# Altium PCB MainboardPCB.PcbDoc (part 1 of 2)
Units mm, origin at the board's own origin, x right, y up, seen from the top; angles counter-clockwise.
Board outline 134.24 x 134.24 mm, 2 copper layers (Top Layer, Bottom Layer); 101 components, 150 nets, 492 pads, 247 vias.
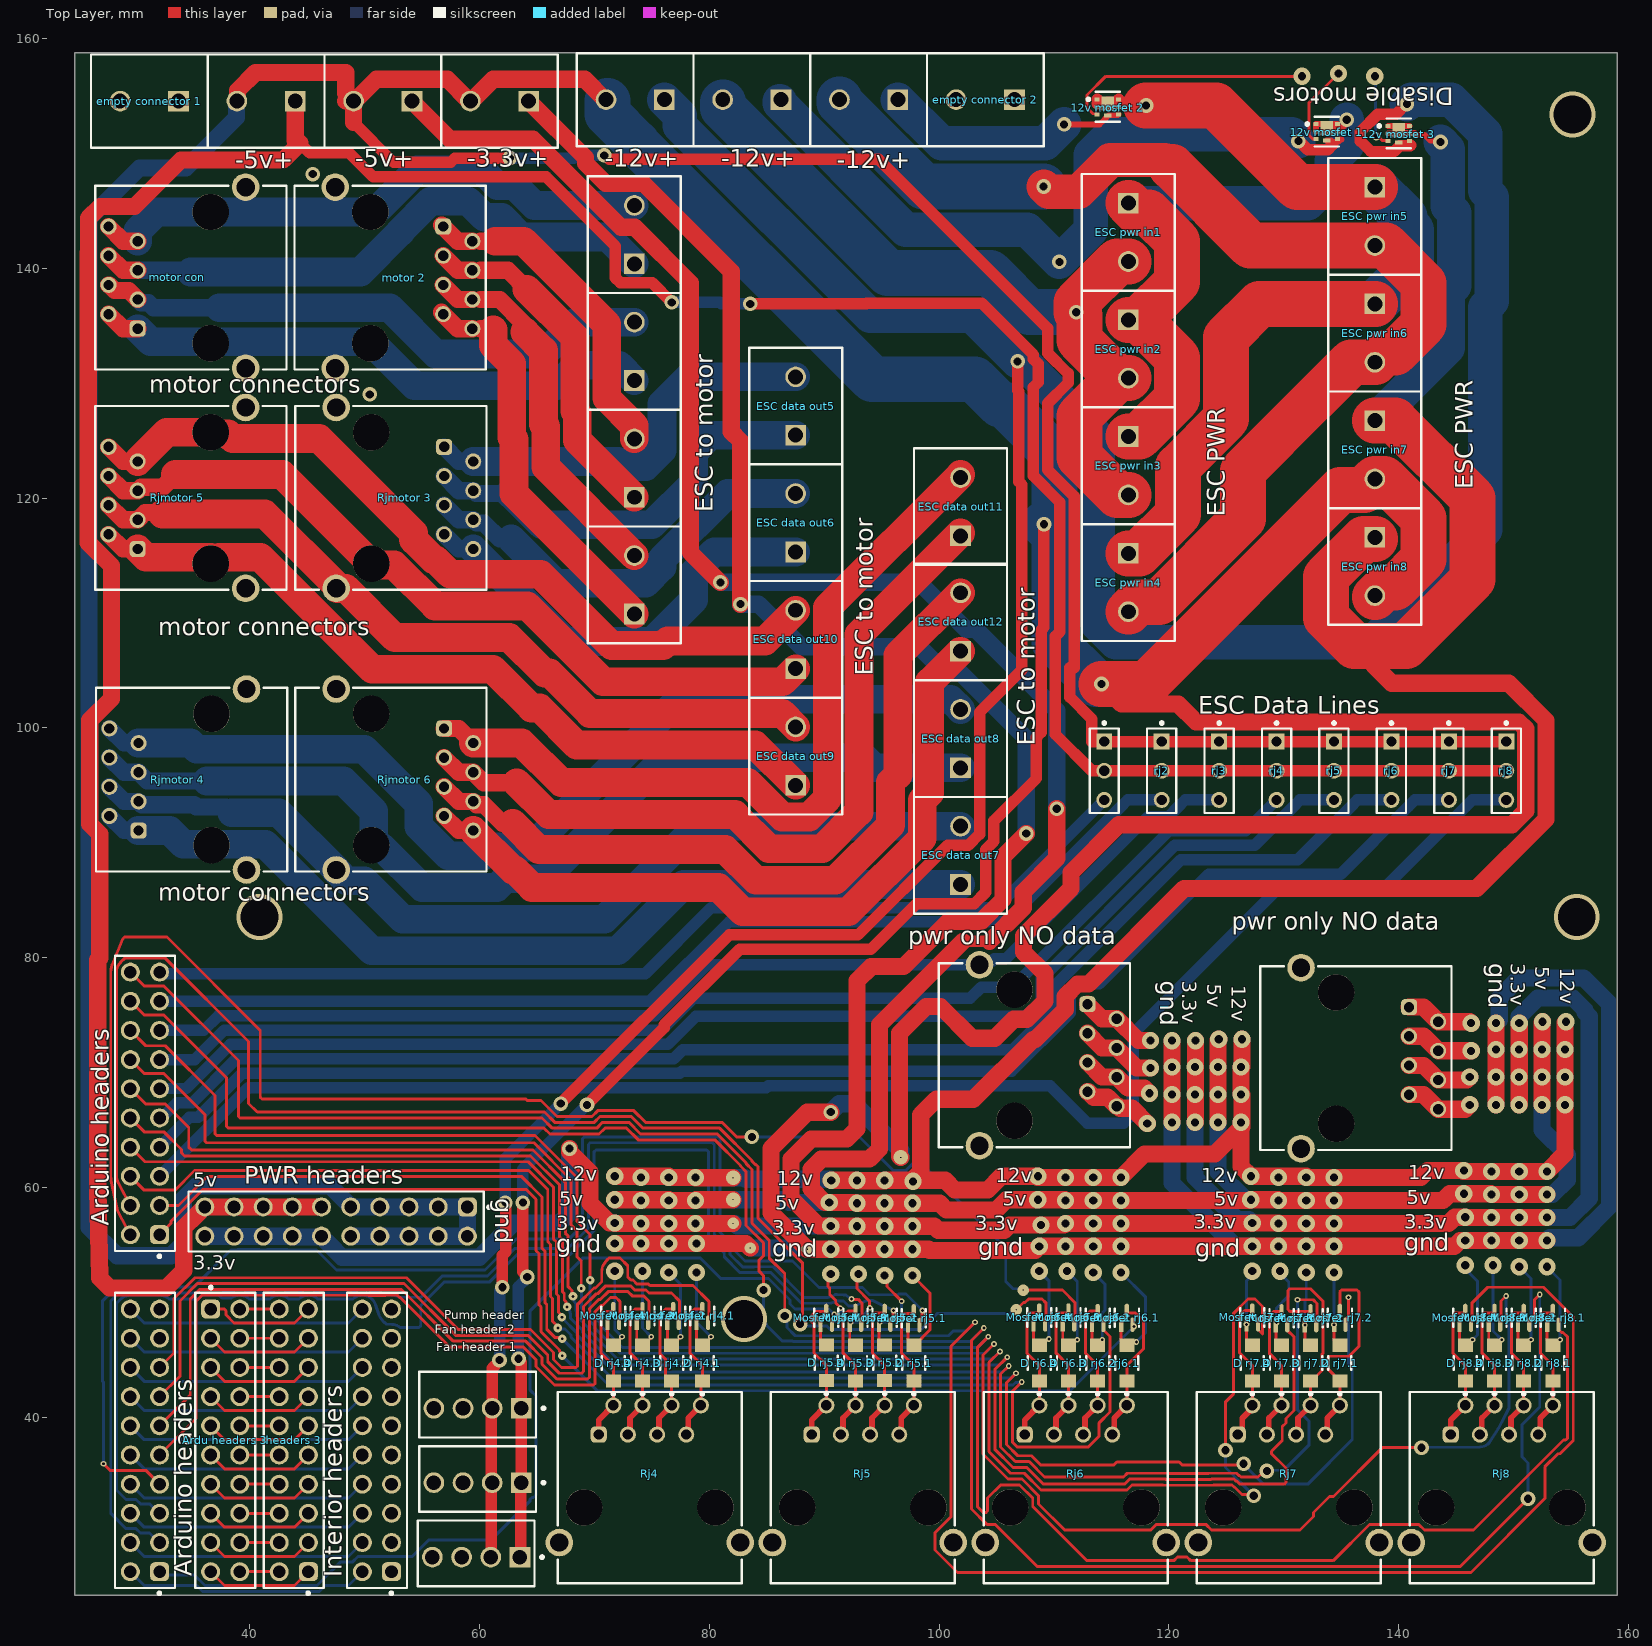
[diagram p0: Top Layer view]
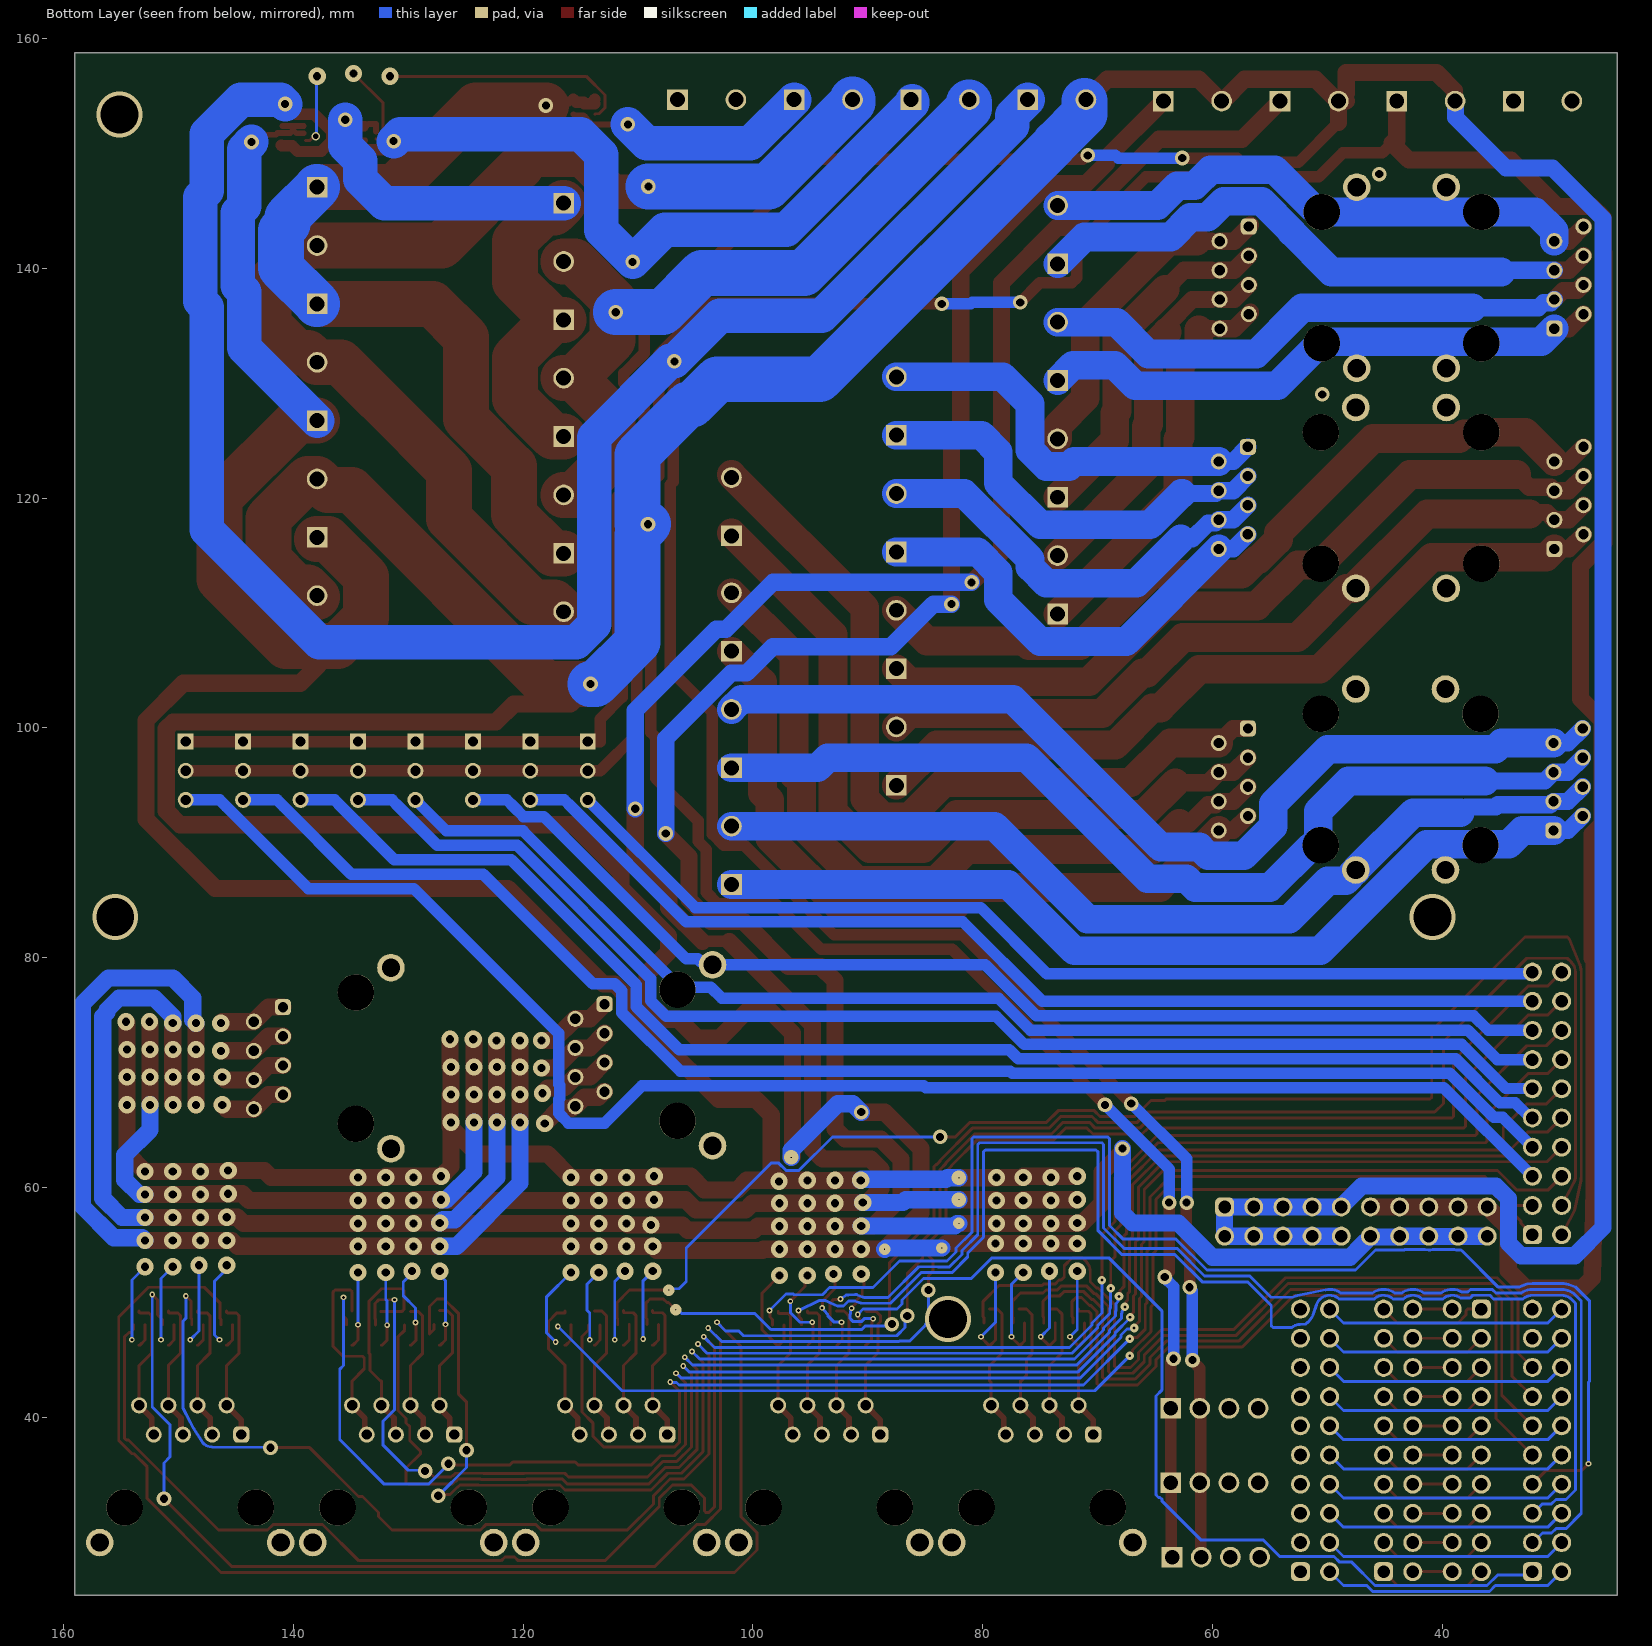
[diagram p1: Bottom Layer view, seen from below]
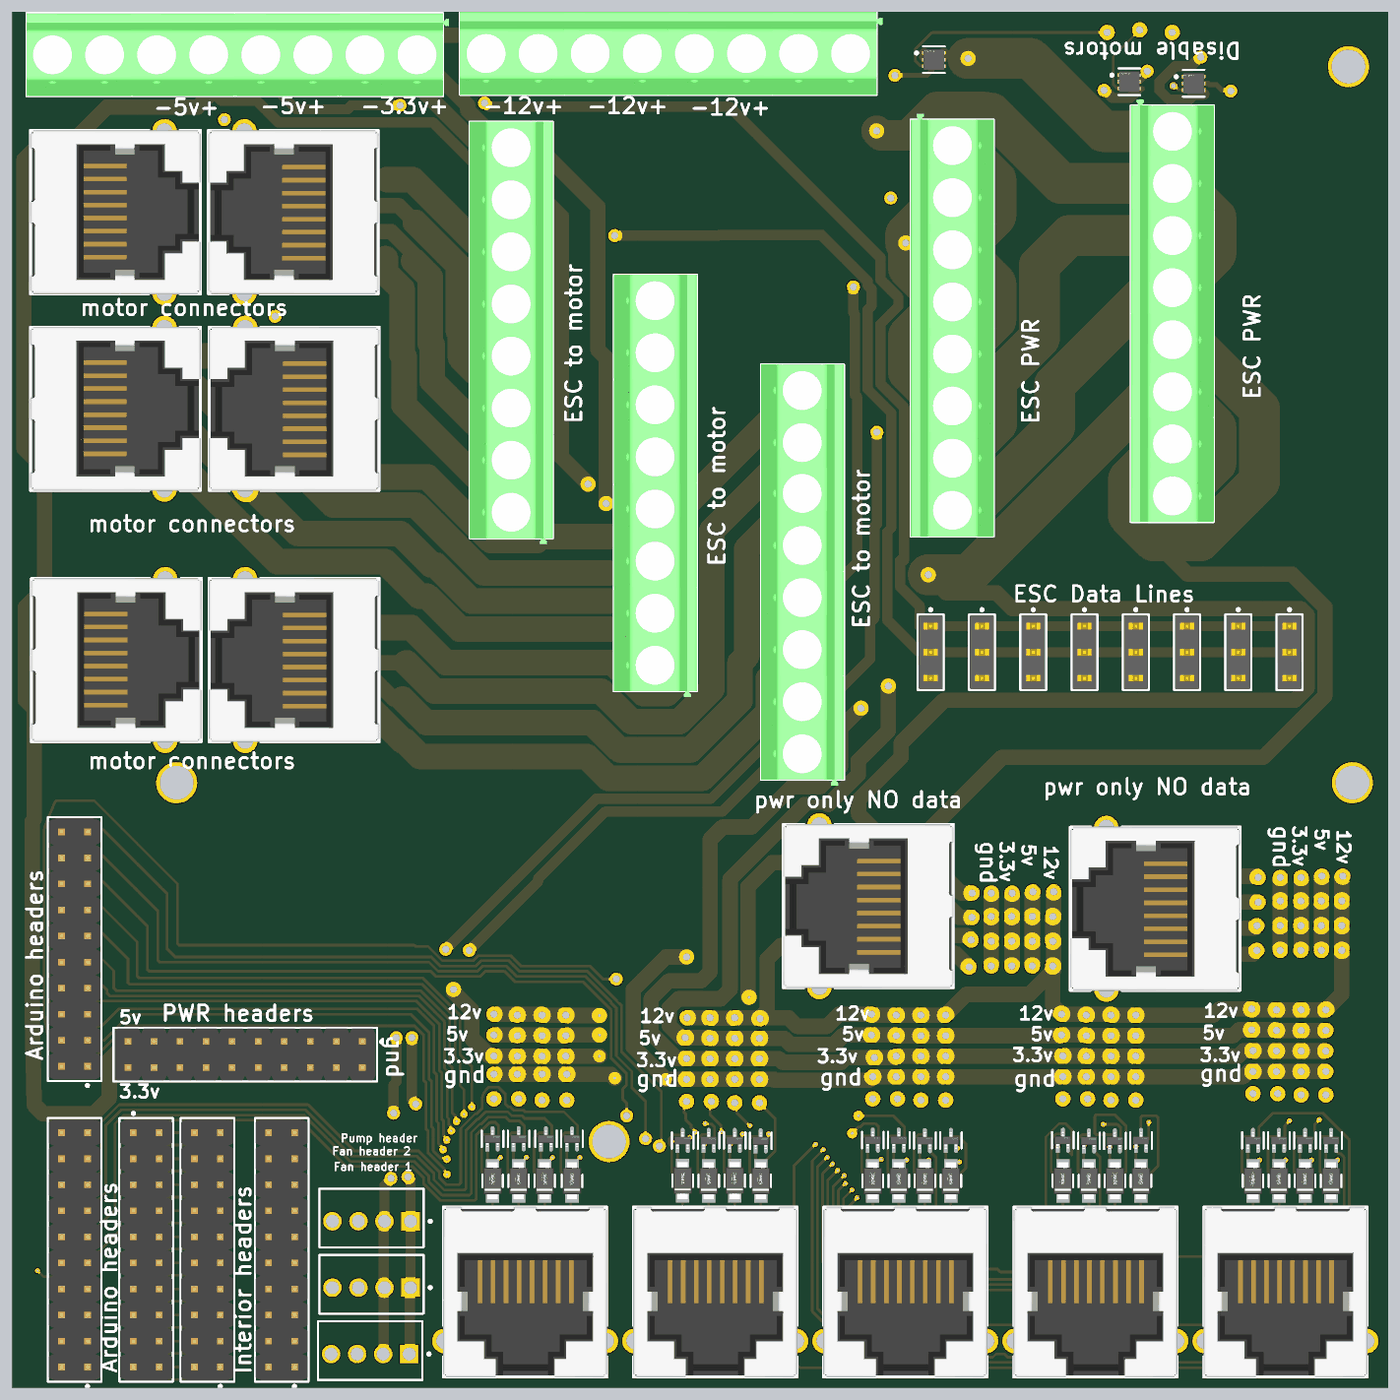
[diagram p3: 3D render of the assembled board from above, using the file's embedded part models]

## Layer stack, top to bottom
Top Solder: solder mask 0.0102, Solder Resist, Dk 3.5
Top Layer: signal copper 0.0356
Dielectric 1: dielectric 0.32, FR-4, Dk 4.8
Bottom Layer: signal copper 0.0356
Bottom Solder: solder mask 0.0102, Solder Resist, Dk 3.5

## Board outline
24.765,24.511 159.004,24.511 159.004,158.75 24.765,158.75

## Design rules (kind name [scope] priority, off if disabled: settings)
Clearance [All] p1: gap=0.254 ignorepadtopadclearanceinfootprint=FALSE
PolygonConnect [All] p1: connectstyle=Relief reliefconductorwidth=0.254 reliefentries=4 polygonreliefangle="90 Angle" airgapwidth=0.254
RoutingVias [All] p1: holewidth=0.711 width=1.27 viastyle="Through Hole" minholewidth=0.711 minwidth=1.27 maxholewidth=0.711 maxwidth=1.27
SolderMaskExpansion [All] p1: expansion=0.102 istentingtop=FALSE
Width [All] p1: maxlimit=5 minlimit=0.254 preferedwidth=0.254 minimp=50.000000 maximp=50.000000 favimp=50.000000
30 further rules are at their usual default settings.

## Classes and differential pairs
component class MainboardPCB: "12v mosfet 1" "12v mosfet 2" "12v mosfet 3" -3.3v+ -5v+ "Ardu headers 3" "D rj4.1" "D rj4.2" "D rj4.3" "D rj4.4" "D rj5.1" "D rj5.2" "D rj5.3" "D rj5.4" "D rj6.2" "D rj6.3" "D rj6.4" "D rj7.1" "D rj7.2" "D rj7.3" "D rj7.4" "D rj8.1" "D rj8.2" "D rj8.3" "D rj8.4" "empty connector 1" "empty connector 2" "ESC data out5" "ESC data out6" "ESC data out7" "ESC data out8" "ESC data out9" "ESC data out10" "ESC data out11" "ESC data out12" "ESC pwr in1" "ESC pwr in2" "ESC pwr in3" "ESC pwr in4" "ESC pwr in5" "ESC pwr in6" "ESC pwr in7" "ESC pwr in8" "Fan header 1" "Fan header 2" "headers 3" "Mosfet rj4.1" "Mosfet rj4.2" "Mosfet rj4.3" "Mosfet rj4.4" "Mosfet rj5.1" "Mosfet rj5.2" "Mosfet rj5.3" "Mosfet rj5.4" "Mosfet rj6.1" "Mosfet rj6.2" "Mosfet rj6.3" "Mosfet rj6.4" "Mosfet rj7.2" "Mosfet rj7.3" "Mosfet rj7.4" "Mosfet rj8.1" "Mosfet rj8.2" "Mosfet rj8.3" "Mosfet rj8.4" "motor 2" "Pump header" rj2 rj3 rj4 Rj4 Rj5 rj5 rj6 Rj6 rj6.1 rj7 Rj7 rj8 Rj8 "Rjmotor 3" "Rjmotor 4" "Rjmotor 5" "Rjmotor 6"

## Components (designator, comment, footprint, x,y, rotation, side; value= is the part's Value field where it differs from the comment)
"12v mosfet 1" "BUK6D43-40PX" FP-SOT1220-MFG 133.739,151.909 r0 top
"12v mosfet 2" "BUK6D43-40PX" FP-SOT1220-MFG 114.681,154.064 r0 top
"12v mosfet 3" "BUK6D43-40PX" FP-SOT1220-MFG 140.012,151.751 r0 top
-3.3v+ "1729128" PHOE-1729128-2_V 61.722,154.559 r180 top (schematic designator 3.3vin)
-5v+ "1729128" PHOE-1729128-2_V 41.402,154.559 r180 top (schematic designator 5vin1)
-5v+ "1729128" PHOE-1729128-2_V 51.562,154.559 r180 top (schematic designator 5vin2)
-12v+ "1729128" PHOE-1729128-2_V 93.853,154.686 r180 top (schematic designator 12vin2)
-12v+ "1729128" PHOE-1729128-2_V 73.533,154.686 r180 top (schematic designator 12vin3)
-12v+ "1729128" PHOE-1729128-2_V 83.693,154.686 r180 top (schematic designator 12vin1)
"Ardu headers 3" "61302021121" 61302021121 37.846,37.973 r270 top
"Arduino headers" "61302021121" 61302021121 30.861,37.973 r90 top (schematic designator "Ardu headers 2")
"Arduino headers" "61302021121" 61302021121 30.861,67.31 r90 top (schematic designator "Ardu headers 1")
"D rj4.1" "1N4007FL" FP-1N4007FL-MFG 79.375,44.704 r90 top
"D rj4.2" "1N4007FL" FP-1N4007FL-MFG 76.708,44.704 r90 top
"D rj4.3" "1N4007FL" FP-1N4007FL-MFG 74.168,44.704 r90 top
"D rj4.4" "1N4007FL" FP-1N4007FL-MFG 71.628,44.704 r90 top
"D rj5.1" "1N4007FL" FP-1N4007FL-MFG 97.79,44.704 r90 top
"D rj5.2" "1N4007FL" FP-1N4007FL-MFG 95.25,44.73 r90 top
"D rj5.3" "1N4007FL" FP-1N4007FL-MFG 92.71,44.704 r90 top
"D rj5.4" "1N4007FL" FP-1N4007FL-MFG 90.17,44.73 r90 top
"D rj6.2" "1N4007FL" FP-1N4007FL-MFG 113.792,44.704 r90 top
"D rj6.3" "1N4007FL" FP-1N4007FL-MFG 111.252,44.704 r90 top
"D rj6.4" "1N4007FL" FP-1N4007FL-MFG 108.712,44.704 r90 top
"D rj7.1" "1N4007FL" FP-1N4007FL-MFG 134.874,44.704 r90 top
"D rj7.2" "1N4007FL" FP-1N4007FL-MFG 132.334,44.704 r90 top
"D rj7.3" "1N4007FL" FP-1N4007FL-MFG 129.794,44.704 r90 top
"D rj7.4" "1N4007FL" FP-1N4007FL-MFG 127.254,44.704 r90 top
"D rj8.1" "1N4007FL" FP-1N4007FL-MFG 153.416,44.704 r90 top
"D rj8.2" "1N4007FL" FP-1N4007FL-MFG 150.876,44.704 r90 top
"D rj8.3" "1N4007FL" FP-1N4007FL-MFG 148.336,44.704 r90 top
"D rj8.4" "1N4007FL" FP-1N4007FL-MFG 145.796,44.704 r90 top
"empty connector 1" "1729128" PHOE-1729128-2_V 31.242,154.559 r180 top
"empty connector 2" "1729128" PHOE-1729128-2_V 104.013,154.686 r180 top
"ESC Data Lines" "87224-3" FP-87224-3-MFG 114.365,96.266 r270 top (schematic designator rj1)
"ESC data out1" "1729128" PHOE-1729128-2_V 73.461,132.777 r90 top
"ESC data out2" "1729128" PHOE-1729128-2_V 73.461,142.937 r90 top
"ESC data out4" "1729128" PHOE-1729128-2_V 73.461,112.457 r90 top
"ESC data out5" "1729128" PHOE-1729128-2_V 87.503,128.016 r90 top
"ESC data out6" "1729128" PHOE-1729128-2_V 87.503,117.856 r90 top
"ESC data out7" "1729128" PHOE-1729128-2_V 101.854,88.9 r90 top
"ESC data out8" "1729128" PHOE-1729128-2_V 101.854,99.06 r90 top
"ESC data out9" "1729128" PHOE-1729128-2_V 87.503,97.536 r90 top
"ESC data out10" "1729128" PHOE-1729128-2_V 87.503,107.696 r90 top
"ESC data out11" "1729128" PHOE-1729128-2_V 101.854,119.253 r90 top
"ESC data out12" "1729128" PHOE-1729128-2_V 101.854,109.22 r90 top
"ESC pwr in1" "1729128" PHOE-1729128-2_V 116.459,143.137 r270 top
"ESC pwr in2" "1729128" PHOE-1729128-2_V 116.459,132.977 r270 top
"ESC pwr in3" "1729128" PHOE-1729128-2_V 116.459,122.817 r270 top
"ESC pwr in4" "1729128" PHOE-1729128-2_V 116.459,112.649 r270 top
"ESC pwr in5" "1729128" PHOE-1729128-2_V 137.922,144.526 r270 top
"ESC pwr in6" "1729128" PHOE-1729128-2_V 137.922,134.366 r270 top
"ESC pwr in7" "1729128" PHOE-1729128-2_V 137.922,124.206 r270 top
"ESC pwr in8" "1729128" PHOE-1729128-2_V 137.922,114.046 r270 top
"ESC to motor" "1729128" PHOE-1729128-2_V 73.461,122.617 r90 top (schematic designator "ESC data out3")
"Fan header 1" "640456-4" TECO-640456-4 59.69,27.813 r0 top
"Fan header 2" "640456-4" TECO-640456-4 59.817,34.29 r0 top
"headers 3" "61302021121" 61302021121 43.815,37.973 r90 top
"Interior headers" "61302021121" 61302021121 51.054,37.973 r90 top (schematic designator "headers 2")
"Mosfet rj4.1" "DMG1013T-7" FP-SOT523-IPC_B 79.375,48.802 r90 top
"Mosfet rj4.2" "DMG1013T-7" FP-SOT523-IPC_B 76.835,48.802 r90 top
"Mosfet rj4.3" "DMG1013T-7" FP-SOT523-IPC_B 74.168,48.802 r90 top
"Mosfet rj4.4" "DMG1013T-7" FP-SOT523-IPC_B 71.628,48.802 r90 top
"Mosfet rj5.1" "DMG1013T-7" FP-SOT523-IPC_B 97.782,48.607 r90 top
"Mosfet rj5.2" "DMG1013T-7" FP-SOT523-IPC_B 95.25,48.641 r90 top
"Mosfet rj5.3" "DMG1013T-7" FP-SOT523-IPC_B 92.71,48.641 r90 top
"Mosfet rj5.4" "DMG1013T-7" FP-SOT523-IPC_B 90.17,48.641 r90 top
"Mosfet rj6.1" "DMG1013T-7" FP-SOT523-IPC_B 116.332,48.641 r90 top
"Mosfet rj6.2" "DMG1013T-7" FP-SOT523-IPC_B 113.793,48.628 r90 top
"Mosfet rj6.3" "DMG1013T-7" FP-SOT523-IPC_B 111.252,48.675 r90 top
"Mosfet rj6.4" "DMG1013T-7" FP-SOT523-IPC_B 108.712,48.675 r90 top
"Mosfet rj7.2" "DMG1013T-7" FP-SOT523-IPC_B 132.326,48.607 r90 top
"Mosfet rj7.2" "DMG1013T-7" FP-SOT523-IPC_B 134.874,48.641 r90 top
"Mosfet rj7.3" "DMG1013T-7" FP-SOT523-IPC_B 129.802,48.607 r90 top
"Mosfet rj7.4" "DMG1013T-7" FP-SOT523-IPC_B 127.254,48.675 r90 top
"Mosfet rj8.1" "DMG1013T-7" FP-SOT523-IPC_B 153.416,48.641 r90 top
"Mosfet rj8.2" "DMG1013T-7" FP-SOT523-IPC_B 150.876,48.641 r90 top
"Mosfet rj8.3" "DMG1013T-7" FP-SOT523-IPC_B 148.336,48.641 r90 top
"Mosfet rj8.4" "DMG1013T-7" FP-SOT523-IPC_B 145.796,48.641 r90 top
"motor 2" "615008138221" 615008138221 52.197,139.192 r270 top (schematic designator "Rjmotor 2")
"motor con" "615008138221" 615008138221 34.851,139.192 r90 top (schematic designator "Rjmotor 1")
"Pump header" "640456-4" TECO-640456-4 59.817,40.767 r0 top
"PWR headers" "61302021121" 61302021121 47.498,57.023 r180 top (schematic designator "Power headers")
"pwr only NO data" "615008138221" 615008138221 108.28,71.5 r270 top (schematic designator "Rj1 (pwr only)")
"pwr only NO data" "615008138221" 615008138221 136.271,71.247 r270 top (schematic designator "Rj2 (Pwr only)")
rj2 "87224-3" FP-87224-3-MFG 119.365,96.266 r270 top
rj3 "87224-3" FP-87224-3-MFG 124.365,96.266 r270 top
rj4 "87224-3" FP-87224-3-MFG 129.365,96.266 r270 top
Rj4 "615008138221" 615008138221 74.804,33.858 r0 top
rj5 "87224-3" FP-87224-3-MFG 134.365,96.266 r270 top
Rj5 "615008138221" 615008138221 93.346,33.858 r0 top
Rj6 "615008138221" 615008138221 111.888,33.858 r0 top
rj6 "87224-3" FP-87224-3-MFG 139.365,96.266 r270 top
rj6.1 "1N4007FL" FP-1N4007FL-MFG 116.332,44.704 r90 top
rj7 "87224-3" FP-87224-3-MFG 144.365,96.266 r270 top
Rj7 "615008138221" 615008138221 130.429,33.856 r0 top
rj8 "87224-3" FP-87224-3-MFG 149.365,96.266 r270 top
Rj8 "615008138221" 615008138221 148.971,33.856 r0 top
"Rjmotor 3" "615008138221" 615008138221 52.273,120.014 r270 top
"Rjmotor 4" "615008138221" 615008138221 34.925,95.504 r90 top
"Rjmotor 5" "615008138221" 615008138221 34.849,120.014 r90 top
"Rjmotor 6" "615008138221" 615008138221 52.271,95.504 r270 top

## Footprints (in the part's own frame and the unit in brackets; to place one, negate y for a bottom-side part, rotate by r counter-clockwise, add the part's x,y. Pads: shape width x height; smd on the part's side, far side on the other; paste and mask are expansions set on the pad)
61302021121 [mm] "Pin Header, pitch 2.54 mm, THT, Vertical, dual row, 20p"
  rrect50% 1.65x1.65 hole 1.1: 1(-11.43,-1.27)
  round 1.65 hole 1.1: 2(-11.43,1.27) 3(-8.89,-1.27) 4(-8.89,1.27) 5(-6.35,-1.27) 6(-6.35,1.27) 7(-3.81,-1.27) 8(-3.81,1.27) 9(-1.27,-1.27) 10(-1.27,1.27) 11(1.27,-1.27) 12(1.27,1.27) 13(3.81,-1.27) 14(3.81,1.27) 15(6.35,-1.27) 16(6.35,1.27) 17(8.89,-1.27) 18(8.89,1.27) 19(11.43,-1.27) 20(11.43,1.27)
  silkscreen extent -13.43,-2.62 12.85,2.62, body extent -12.7,-2.54 12.7,2.54, height 8.59
615008138221 [mm] "Modular Jack Vertical Shielded 8P8C Front Post"
  rrect50% 1.4x1.4 hole 0.9: 1(-4.445,4.625)
  round 1.4 hole 0.9: 2(-3.175,7.165) 3(-1.905,4.625) 4(-0.635,7.165) 5(0.635,4.625) 6(1.905,7.165) 7(3.175,4.625) 8(4.445,7.165)
  round 3.17 hole 3.17 unplated: M1(-5.715,-1.725) M2(5.715,-1.725)
  round 2.4 hole 1.6: Shell(-7.875,-4.775) Shell(7.875,-4.775)
  silkscreen extent -8,-8.32 8,8.32, body extent -8,-8.32 8,8.33, height 16.62
FP-1N4007FL-MFG [mm]
  rect 1.15x1.3 smd paste+0 mask+0: 1(-1.55,0) 2(1.55,0)
  silkscreen extent -2.8,-1 0.6,1, body extent -2.22,-1.1 2.22,1.1, height 0.25
FP-87224-3-MFG [mil]
  rect 54.69x54.69 hole 35 paste-99999 mask+0: 1(-100,0)
  round 54.69 hole 35 paste-99999 mask+0: 2(0,0) 3(100,0)
  silkscreen extent -168,-50 145,50, body extent -148,-54 148,54, height 10
FP-SOT523-IPC_B [mm]
  rect 1.257x0.376 smd paste+0 mask+0: 1(-0.601,0.5)
  rrect100% 1.257x0.376 smd paste+0 mask+0: 2(-0.601,-0.5) 3(0.601,0)
  silkscreen extent -0.8,-1.05 0.8,1.05, body extent -1.48,-1.05 1.48,1.05, height 0.25
FP-SOT1220-MFG [mm]
  rect 0.43x0.35 smd paste-1000 mask+0: 1(-0.935,0.65) 2(-0.935,0) 3(-0.935,-0.65) 4(0.935,-0.65) 5(0.935,0) 6(0.935,0.65)
  rect 1.1x1.25 smd paste-1000 mask+0: 7(0,0.285)
  rect 0.66x0.35 smd paste-1000 mask+0: 8(0,-0.775)
  silkscreen extent -1.82,-1.3 1.05,1.3, body extent -1.25,-1.15 1.25,1.15, height 0.25
PHOE-1729128-2_V [mm] "Receptacle, 2-Leads, Body 8.1x10.16mm, Pitch 5.08mm"
  rect 1.8x1.8 hole 1.3: 1(-2.54,0)
  round 1.8 hole 1.3: 2(2.54,0)
  silkscreen extent -5.08,-4.05 5.08,4.05, body extent -5.65,-4.05 5.08,4.05, height 10.01
TECO-640456-4 [mm] "Through Hole, 4-Leads, Body 10.16x5.72mm, Pitch 2.54mm"
  rect 1.8x1.8 hole 1.27 paste-2539.97: 1(3.81,0)
  round 1.8 hole 1.27 paste-2539.97: 2(1.27,0) 3(-1.27,0) 4(-3.81,0)
  silkscreen extent -5.08,-2.54 5.86,3.18, body extent -5.08,-2.54 5.08,3.18, height 10.03

## Part data
"12v mosfet 1" "12v mosfet 2" "12v mosfet 3": library part CMP-11424-88017679-1, "BUK6D43-40PX Mosfet, Aec-Q101, P-Ch, -40V, Sot-1220; Rohs Compliant: Yes", Manufacturer Lifecycle Status="RELEASED FOR SUPPLY", Lifecycle Status=Production, NexarPartId=88017679, RoHS=Non-Compliant, Schedule B=8541290080
-3.3v+ -5v+ -5v+ -12v+ -12v+ -12v+ "empty connector 1" "empty connector 2" "ESC data out1" "ESC data out2" "ESC data out4" "ESC data out5" "ESC data out6" "ESC data out7" "ESC data out8" "ESC data out9" "ESC data out10" "ESC data out11" "ESC data out12" "ESC pwr in1" "ESC pwr in2" "ESC pwr in3" "ESC pwr in4" "ESC pwr in5" "ESC pwr in6" "ESC pwr in7" "ESC pwr in8" "ESC to motor": library part CMP-2000-05815-1, "PCB Terminal Block, 13.5 A, 400 V, 2-Pin THD, RoHS, Bulk", Current Rating=13500mA, Manufacturer="Phoenix Contact", Package Description="2-Pin Through Hole Device, Body 8.1 x 10.16 mm, Pitch 5.08 mm", Package Reference=1729128-2, Package Version=03/2015, Voltage Rating=400V, Datasheet URL=https://datasheet.ciiva.com/16046/1729128-16046181.pdf, Datasheet Version=12/2013, Manufacturer URL=http://www.phoenixcontact.com/, Mounting Technology=ThroughHole, No. of Positions=2, No. of Rows=1, Orientation=Horizontal, Package URL=https://www.phoenixcontact.com/online/portal/pi/pxc/product_detail_page/!ut/p/b1/3VdJjqNKFDxLH8AFycySyWY2ozFsEPOMMQaDOX1XedGL_1Vdm5YXJleknhSKeBkvI6EA8ncAo3AYoDhBQGco6KN7VURTdemj9us_IEKEZo_YHiPAEWEFmDGOHMORkqKYCORBZxgL7ZoaZYcbFFUZ3fqxSY6GOuxydWUuHqz1ynmMFygu583Bob0Ewr6Sd_l-5m-kAueHiB0jpRwZwe58wwtkpxtMYd_LmGcDRU02dRNEyWt6Y2ti5pSyJ_reIkzIulrqApdnbT11V5jnCKbYNCvhEM1MCpPByat_X379-iThf08CI5GfOPqfBeS3BRoBOdD55AKVv0iLwCMq-2BrzXWSGRH7pUGD9uwXQjiph3xL0DKQwdGa0JImiIOmBNOestqgwTHSSs2oOep-78apyXQBvNi8ZLaFjvjWvcaUEBu0MC6Wbe-d6mB0FAebo2lUWinqYaZs5DAYzV0RP9yitUjnGJ0iI9xhZkT42OCQNUJJhkgWINNQLP2JFP6OpMg3JCVg70jqHT0lvKOnhHf0lPuOnnLf0VPuWx6_dxwUIvwk5WMkT0kLL1mh61l2yZVSzG3pYV_bqo-mj6uMKwKwdnnW8Jh5RTOJzMOA5c-eJDaZQw4mTMPH02PvS_ZAqNVjVTo2WyYLkwH_KU1mmmG5kjRhDqPXLwwVHvVOjCM60-fpXvTDfMGW1PVFVS1r4e4yVDk4ZdNbkUHvqPqQSeian4UD39fNKmachqdJ1NJbyk8rXT9mXTvPk3oE5meulKGgiruPJek-4I9hTT6G8ZLOyRSm2RRVbThERQad5OS28hdt4YW4vG0stgYYzsWsK4_7y6DZMjJSCqri1kyiZR5vD7pwIrNR7QwPHTcLTI5qT7eRlpHrdGiupYlqQDJ7zy_CND8fWWBoLRXxk1RVcXiBQwbTD4Xi7KL-FuO94t9xaqweXzH, Packing=Bulk, PartNumber=1729128, Pitch=5.08mm, RoHS=TRUE
"Ardu headers 3" "Arduino headers" "Arduino headers" "headers 3" "Interior headers" "PWR headers": library part CMP-1502-01104-3, Color=Black, Contact Resistance=20mΩ, Current Rating=3A, Operating Supply Voltage=250V, Connector Type="Male Pin", Contact Material=Copper, Contact Mating Length=5.9944mm, Contact Plating=Gold, Gender=Male, Lead Pitch=2.54mm, Mount="Through Hole", NexarPartId=32855556, Number of Contacts=20, Number of Pins=20, Number of Positions=20, Number of Rows=2, Orientation=Vertical, Packaging=Bulk, Pitch=2.54mm, REACH SVHC=Unknown, RoHS=Compliant, Row Spacing=2.54mm, Termination=Solder
"D rj4.1" "D rj4.2" "D rj4.3" "D rj4.4" "D rj5.1" "D rj5.2" "D rj5.3" "D rj5.4" "D rj6.2" "D rj6.3" "D rj6.4" "D rj7.1" "D rj7.2" "D rj7.3" "D rj7.4" "D rj8.1" "D rj8.2" "D rj8.3" "D rj8.4" rj6.1: library part CMP-10078-122641204-1, "1N4007FL Diode Gen Purp 1KV 1A SOD123FL", Capacitance=6pF, Forward Current=1A, Max Forward Surge Current (Ifsm)=30A, Max Junction Temperature (Tj)=150°C, Max Repetitive Reverse Voltage (Vrrm)=1kV, Min Operating Temperature=-55°C, Peak Reverse Current=5µA, Height=1.1mm, Max Operating Temperature=150°C, NexarPartId=122641204, Reverse Voltage=1kV
"ESC Data Lines" rj2 rj3 rj4 rj5 rj6 rj7 rj8: library part CMP-2000-05697-2, "CONN HEADER VERT 3POS 2.54MM", Color=Black, Contact Current Rating=3A, Flammability Rating="UL94 V-0", High Temperature Housing=No, Max Operating Temperature=105°C, Min Operating Temperature=-65°C, Package Quantity=520, Approvals=CSA, Board Standoff="No (Without)", Connector Type=Plug, Contact Gender=Male, Contact Material=Bronze, Contact Mating Length=8.08mm, Contact Plating=Gold, Contact Post Length=0.125inch, Contact Protection="No (Without)", Contact Shape=Square, Contact Type="Male Pin", Current Rating=3A, Depth=2.54mm, ELV=Compliant, Gasket="No (Without)", High Speed Serial Data Connector=No, Housing Color=Black, Housing Material=Thermoplastic, Keyed=No, Lead Free="Lead Free", Length=7.21mm, Mating Alignment="No (Without)", Mating Connector Lock="No (Without)", Mount="Through Hole", Number of Contacts=3, Number of Positions=3, Number of Rows=1, Orientation=Straight, Packaging=Carton, PCB Mount Retention=Without, PCB Mounting Orientation=Vertical, PCB Thickness=1.397mm, Pitch=2.54mm, Radiation Hardening=No, RoHS Compliant=Yes, Row Spacing=2.54mm, Selectively Loaded="No (Without)", Series="AMPMODU MOD II", Stabilizers="No (Without)", Strain Relief="No (Without)", Termination="Through Hole"
"Fan header 1" "Fan header 2" "Pump header": library part CMP-2000-05419-1, "Male Header, Pitch 2.54 mm, 1 x 4 Position, Height 10.03 mm, Tail Length 3.56 mm, RoHS, Bulk", Color=White, Current, Rating="5 /  / A", Flammability Rating=UL94V-0, Manufacturer="TE Connectivity", Temperature, Operating="-55to+105 /  / degC", Voltage, Rating="250 /  / V", Agency Approvals=CSA,UL, Angle=Straight, Brand/Series=MTA-100Series, Color, Housing=White, Connector Type=MTA-100, Contact Centerline Spacing="0.100 /  / in.", Contact Mating Area Plating=Tin, Contact Plating=Tin, Contact Shape=Square, Contact Termination Area Plating=Tin, Datasheet URL=https://datasheet.ciiva.com/16286/eng-ds-82056-mta-0608-16286228.pdf, Datasheet Version=Dec-14, Length, Overall="0.4 /  / \"", Length, Pin="0.14 /  / \"", Length, Terminal Post="0.14 /  / in.", Manufacturer URL=http://www.te.com/, Material, Contact=CopperAlloy, Material, Housing=Polyester, Mount Angle=Vertical, Mounting Hole Size="0.04 /  / \"", Mounting Type=PCMount, Number of Contacts=4, Number of Positions=4, Number of Rows=1, Pin Spacing="0.1 /  / \"", Primary Type=InterconnectSystem, Size, Post="0.025 /  / in.", Special Features=Pinstrip, Standards=RoHSCompliant,ELVCompliant,UL94V-0, Termination=Solder, Type=PCBPlug
"Mosfet rj4.1" "Mosfet rj4.2" "Mosfet rj4.3" "Mosfet rj4.4" "Mosfet rj5.1" "Mosfet rj5.2" "Mosfet rj5.3" "Mosfet rj5.4" "Mosfet rj6.1" "Mosfet rj6.2" "Mosfet rj6.3" "Mosfet rj6.4" "Mosfet rj7.2" "Mosfet rj7.2" "Mosfet rj7.3" "Mosfet rj7.4" "Mosfet rj8.1" "Mosfet rj8.2" "Mosfet rj8.3" "Mosfet rj8.4": library part CMP-12801-000011-2, "MOSFET P-CH 20V 0.46A SOT-523", Case/Package=SOT-523, Continuous Drain Current (ID)=460mA, Drain to Source Breakdown Voltage=-20V, Drain to Source Resistance=1R, Drain to Source Voltage (Vdss)=20V, Gate to Source Voltage (Vgs)=6V, Input Capacitance=59.76pF, Max Operating Temperature=150°C, Max Power Dissipation=270mW, Min Operating Temperature=-55°C, On-State Resistance=700mR, Package Quantity=1, Threshold Voltage=-1V, Contact Plating=Tin, Element Configuration=Single, Fall Time=20.7ns, Height=0.8mm, Lead Free="Lead Free", Length=1.7mm, Mount="Surface Mount", Number of Channels=1, Number of Elements=1, Number of Pins=3, Packaging="Tape and Reel", Power Dissipation=270mW, Radiation Hardening=No, Rds On Max=700mR, REACH SVHC="No SVHC", Rise Time=8.1ns, Turn-Off Delay Time=28.4ns, Turn-On Delay Time=5.1ns, Weight=7.1E-05oz, Width=0.85mm
"motor 2" "motor con" "pwr only NO data" "pwr only NO data" Rj4 Rj5 Rj6 Rj7 Rj8 "Rjmotor 3" "Rjmotor 4" "Rjmotor 5" "Rjmotor 6": library part CMP-1502-01731-2, Color=Black, Contact Resistance=20mΩ, Current Rating=1.5A, Insulation Resistance=500MΩ, Max Operating Temperature=85°C, Min Operating Temperature=-40°C, Operating Supply Voltage=120V, Voltage Rating=125V, Connector Type="RJ45, Socket", Contact Material=Copper, Contact Plating=Gold, Depth=16.4mm, Direction="User Selectable", Gender=Female, Height=16.65mm, Housing Material=PBT, Insulation Material=PBT, Length=16.65mm, Mount="Through Hole", NexarPartId=18818181, Number of Contacts=8, Number of Ports=1, Number of Positions=8, Number of Rows=1, Orientation=Vertical, REACH SVHC=Unknown, RoHS=Compliant, Shielding=Shielded, Termination="Through Hole", Width=15.9mm

## Via types
v1: diameter 1.5, hole 0.711, Top Layer to Bottom Layer, 143 vias
v2: diameter 1.27, hole 0.711, Top Layer to Bottom Layer, 42 vias
v3: diameter 0.5, hole 0.25, Top Layer to Bottom Layer, 41 vias
v4: diameter 0.75, hole 0.25, Top Layer to Bottom Layer, 8 vias
v5: diameter 1, hole 0, Top Layer to Bottom Layer, 5 vias
v6: diameter 4, hole 3.3, Top Layer to Bottom Layer, 4 vias
v7: diameter 1.27, hole 0, Top Layer to Bottom Layer, 3 vias
v8: diameter 0.75, hole 0.5, Top Layer to Bottom Layer, 1 vias

## Nets (pads, with @x,y where several pads share a name; then routed paths per layer and width w, separated by ;. In a path a pad name is that pad's centre, name@x,y a point inside that pad or via, vN(x,y) a via of type N, cw(c..) or ccw(c..) an arc to the next point about the centre after c; other vN are vias at no path point)
3.3v: 
5v: -5v+.1@54.102,154.559 | length 263
  Top Layer w1: 102.05,81.407 104.375,81.407
  Top Layer w1.5: -5v+.1@54.102,154.559 57.416,151.245 64.632,151.245 72.304,143.573 73.505,143.573 78.352,138.726 78.352,115.256 v2(80.948,112.66) ; v1(71.755,58.928) v1@76.454,58.928 ; v1(76.454,58.864) v1(78.776,58.864) 78.84,58.928 v7(82.054,58.928) ; 102.05,81.407 94.794,74.151 94.794,63.339 93.915,62.46 89.731,62.46 88.852,61.581 88.852,59.883 90.061,58.674 92.773,58.674 v1(92.837,58.61) v1(95.25,58.61) v1(97.663,58.61) 100.039,58.61 100.632,58.017 104.941,58.017 105.852,58.928 v1(108.585,58.928) 110.934,58.928 v1(110.998,58.864) v1(113.411,58.864) v1(115.824,58.864) 127.063,58.864 v1(127.127,58.928) 129.476,58.928 v1(129.54,58.864) v1(131.953,58.864) v1(134.366,58.864) 143.864,58.864 144.436,59.436 v1(145.669,59.436) 148.018,59.436 v1(148.082,59.372) v1(150.495,59.372) v1(152.908,59.372) ; 104.375,81.407 107.305,84.338 107.305,85.715 110.236,88.646 v2(110.236,92.964) ; v1(124.269,65.659) v1(124.269,68.072) v1(124.269,70.485) 124.269,72.834 v1(124.333,72.898) ; v1(152.463,67.183) v1(152.463,69.596) v1(152.463,72.009) 152.463,74.358 v1(152.527,74.422)
  Bottom Layer w1.5: v2(80.948,112.66) 80.973,112.685 98.237,112.685 102.337,108.584 103.17,108.584 110.236,101.518 v2(110.236,92.964) ; v7(82.054,58.928) 86.674,58.928 86.928,58.674 v1(90.424,58.674) ; v1(124.269,65.659) 124.269,61.337 126.678,58.928 v1(127.127,58.928) ; v1(152.463,67.183) 152.463,65.014 154.662,62.815 154.662,60.645 153.389,59.372 v1(152.908,59.372)
  other v1: 74.041,58.864
"motor disable 1": "12v mosfet 2.3" | length 21.6
  Top Layer w0.254: 113.746,153.414 113.698,153.462 113.381,153.462 112.865,153.978 112.865,155.079 114.504,156.718 v1(131.572,156.718)
"motor disable 2": "12v mosfet 1.3" | length 7.2
  Top Layer w0.254: 132.804,151.259 132.785,151.278 132.506,151.278 132.173,151.611 132.173,154.398 v1(134.747,156.972)
"motor disable 3": "12v mosfet 3.3" | length 6.3
  Top Layer w0.254: v8(138.049,151.511) 138.183,151.511 138.564,151.13 138.938,151.13
  Bottom Layer w0.254: v8(138.049,151.511) 137.986,151.575 137.986,156.654 v1@138.049,156.718
  other v1: 137.922,156.718
Net3.3vin_1: "PWR headers.12" "PWR headers.14" "PWR headers.16" "PWR headers.18" "PWR headers.20" -3.3v+.1 | length 325
  Top Layer w1.5: 46.228,55.712 46.228,55.753 ; -3.3v+.1@64.262,154.559 69.202,149.619 69.202,149.156 70.977,147.381 74.25,147.381 81.904,139.727 81.904,125.774 82.702,124.976 v2(82.702,110.769) ; v2(67.818,63.373) 67.818,63.104 69.596,61.326 69.596,58.606 71.306,56.896 v1(71.755,56.896) ; v1@71.787,56.864 v1(74.041,56.864) v1(76.454,56.864) v1(78.776,56.864) v5(82.054,56.864) ; v1@92.836,56.61 92.805,56.642 v1(90.551,56.642) 89.527,56.642 87.098,59.071 87.098,62.46 88.852,64.214 91.958,64.214 92.837,65.093 92.837,77.986 94.069,79.218 96.887,79.218 100.83,83.161 103.648,83.161 105.551,85.064 105.551,88.787 v2(107.569,90.805) ; v1@92.837,56.611 v1@95.25,56.611 ; v1(95.25,56.61) v1(97.663,56.61) 99.558,56.61 99.905,56.263 105.668,56.263 106.135,56.73 v1(108.866,56.73) 110.864,56.73 v1(110.998,56.864) v1(113.411,56.864) v1(115.824,56.864) 127.222,56.864 v1(127.254,56.896) 129.508,56.896 v1(129.54,56.864) v1(131.953,56.864) v1(134.366,56.864) 144.344,56.864 144.884,57.404 v1(145.796,57.404) 145.828,57.372 v1(148.082,57.372) v1(150.495,57.372) v1(152.908,57.372) ; v1(122.269,65.659) 122.301,65.691 v1(122.301,72.771) ; v1(150.463,67.183) 150.495,67.215 v1(150.495,74.295)
  Bottom Layer w1.5: 36.068,55.753 38.608,55.753 ; 38.539,55.724 41.119,55.724 ; 41.148,55.753 43.688,55.753 ; 43.757,55.684 46.228,55.684 ; 46.257,55.684 46.939,55.001 46.939,54.995 48.01,53.924 59.987,53.924 62.959,56.896 66.939,56.896 67.818,57.775 v2(67.818,63.373) ; v5(82.054,56.864) 82.201,56.864 82.423,56.642 v1(90.551,56.642) ; v2(82.702,110.769) 84.277,110.769 87.986,107.06 98.254,107.06 100.538,104.776 101.866,104.776 107.569,99.073 v2(107.569,90.805) ; v1(122.269,65.659) 122.269,60.857 125.952,57.174 126.976,57.174 v1(127.254,56.896) ; v1(150.495,74.295) 150.495,74.871 152.102,76.478 155.17,76.478 156.21,75.438 156.21,75.252 156.591,74.871 156.591,59.055 154.908,57.372 v1(152.908,57.372)
  other v1: 92.837,56.61 122.269,68.072 150.463,69.596 122.269,70.485 150.463,72.009
Net3.3vin_2: "ESC Data Lines.1" "ESC pwr in7.2" "ESC pwr in8.2" "Fan header 1.1" "Fan header 2.1" "Pump header.1" "PWR headers.1" "PWR headers.2" "PWR headers.3" "PWR headers.4" "PWR headers.5" "PWR headers.6" "PWR headers.7" "PWR headers.8" "PWR headers.9" "PWR headers.10" -3.3v+.2 -5v+.2 -12v+.2@70.993,154.686 rj2.1 rj3.1 rj4.1 rj5.1 rj6.1 rj7.1 rj8.1 | length 882.4
  Top Layer w1: 49.022,152.699 52.496,149.225 57.458,149.225 57.839,149.606 v2@62.538,149.606 ; v2(63.372,45.084) 63.372,45.011 63.627,44.756 63.627,40.767 63.627,34.353 63.563,34.29 63.563,27.877 63.5,27.813 ; v2@63.754,58.601 63.754,52.651 64.135,52.27 v2(64.135,52.197) ; v2(69.342,67.183) 76.074,73.915 76.074,74.169 82.627,80.722 94.057,80.722 98.041,84.706 103.066,84.706 104.047,85.687 104.047,89.41 104.762,90.125 104.762,91.903 108.458,95.599 108.458,99.187 108.867,99.596 108.867,108.501 109.117,108.751 v2(109.117,117.729) ; v2(70.841,149.835) 70.914,149.835 71.27,149.479 94.742,149.479 109.451,134.77 109.451,132.614 111.214,130.851 111.214,130.023 109.451,128.26 109.451,122.454 111.76,120.145 111.76,105.225 ; 111.375,105.225 111.375,102.68 113.284,100.771 113.284,98.806 114.365,98.806 rj2.1@119.365,98.806 rj3.1@124.365,98.806 rj4.1@129.365,98.806 rj5.1@134.365,98.806 rj6.1@139.365,98.806 rj7.1@144.365,98.806 rj8.1@149.365,98.806
  Top Layer w1.5: -5v+.2@38.862,154.559 38.919,154.616 38.919,155.486 40.492,157.058 48.346,157.058 48.346,155.235 ; -5v+.2@48.346,154.559 -5v+.2@49.022,154.559 49.022,152.699 ; -5v+.2@49.103,154.559 51.007,156.463 57.197,156.463 59.101,154.559 -3.3v+.2@59.182,154.559 59.263,154.559 61.167,156.463 69.135,156.463 70.912,154.686 -12v+.2@70.993,154.686 ; v1(71.755,55.106) v1(74.041,55.106) v1(76.454,55.106) v1(78.867,55.106) 83.165,55.106 v5(83.55,54.721) ; v2(90.551,66.548) 88.519,66.548 85.344,63.373 85.344,57.785 v5(88.519,54.61) v1(90.551,54.61) v1(92.837,54.61) v1(95.25,54.61) v1(97.663,54.61) 99.078,54.61 99.179,54.509 108.357,54.509 v1(108.712,54.864) v1(110.998,54.864) v1(113.411,54.864) v1(115.824,54.864) v1(127.254,54.864) v1(129.54,54.864) v1(131.953,54.864) v1(134.366,54.864) 144.825,54.864 145.333,55.372 v1(145.796,55.372) v1(148.082,55.372) v1(150.495,55.372) v1(152.908,55.372) ; v7(96.647,62.611) 96.548,62.71 96.548,73.424 98.864,75.74 100.106,75.74 102.87,72.976 104.841,72.976 106.491,74.626 107.627,74.626 109.217,76.215 109.217,78.595 107.325,80.486 107.325,81.877 111.482,86.033 111.482,87.411 115.638,91.567 149.86,91.567 151.064,92.771 151.064,99.916 150.475,100.505 122.36,100.505 120.8,102.065 115.884,102.065 v2(114.129,103.821) ; v1(120.269,65.659) v1(120.269,68.072) v1(120.269,70.485) v1(120.269,72.771) ; v1(148.463,67.183) v1(148.463,69.596) v1(148.463,72.009) v1(148.463,74.295)
  Top Layer w4: v2(114.129,103.821) 118.051,103.821 134.943,120.713 136.969,120.713 137.922,121.666 138.731,121.666 142.176,118.221 142.176,114.697 139.684,112.205 ; 137.922,111.379 138.748,112.205
  Bottom Layer w1: v2(62.611,149.606) 68.206,149.606 68.435,149.835 v2(70.841,149.835) ; v2(63.372,45.084) v2(63.372,45.084) 63.373,51.362 64.135,52.124 v2(64.135,52.197) ; v2(63.754,58.674) 63.754,61.595 v2(69.342,67.183)
  Bottom Layer w1.5: -5v+.2@38.862,154.559 38.833,154.53 38.833,153.133 34.438,148.738 30.377,148.738 25.982,144.343 25.982,140.282 25.98,140.28 25.98,56.505 28.434,54.051 33.13,54.051 34.22,55.141 34.22,59.032 35.31,60.122 46.986,60.122 48.057,59.051 48.057,59.045 48.768,58.334 48.768,58.293 51.308,58.293 53.848,58.293 56.388,58.293 58.928,58.293 58.928,55.753 56.388,55.753 53.848,55.753 51.308,55.753 48.768,55.753 ; v5(83.55,54.721) 83.554,54.725 88.404,54.725 v5(88.519,54.61) ; v2(90.551,66.548) 91.289,67.286 92.595,67.286 96.647,63.234 v7(96.647,62.611) ; v1(120.269,65.659) 120.269,60.376 125.781,54.864 v1(127.254,54.864) ; v1(148.463,74.295) 148.741,74.573 148.741,76.488 150.485,78.232 156.083,78.232 158.345,75.97 158.345,58.328 155.635,55.618 153.154,55.618 v1(152.908,55.372)
  Bottom Layer w4: -12v+.2@71.129,154.55 71.129,153.442 73.675,150.896 73.675,150.859 94.188,130.347 103.068,130.347 105.267,128.148 105.659,128.148 110.051,123.756 110.051,117.729 ; v2(109.117,117.729) 110.051,116.795 110.051,107.455 113.685,103.821 v2(114.129,103.821)
Net5vin1_1: "ESC Data Lines.2" "PWR headers.11" "PWR headers.13" "PWR headers.15" "PWR headers.17" "PWR headers.19" -5v+.1@43.942,154.559 rj2.2 rj3.2 rj4.2 rj5.2 rj6.2 rj7.2 rj8.2 | length 292.3
  Top Layer w1: 44.353,150.901 45.191,150.062 48.624,150.062 50.732,147.955 65.796,147.955 71.807,141.944 71.807,139.185 72.249,138.743 75.008,138.743 v2(76.713,137.038) ; v2(83.543,136.906) 93.633,136.906 93.699,136.971 103.716,136.971 108.197,132.49 108.197,132.095 108.605,131.686 108.605,130.073 108.197,129.665 108.197,121.935 110.506,119.626 110.506,108.367 110.121,107.982 110.121,99.429 113.284,96.266 114.365,96.266 rj2.2@119.365,96.266 rj3.2@124.365,96.266 rj4.2@129.365,96.266 rj5.2@134.365,96.266 rj6.2@139.365,96.266 rj7.2@144.365,96.266 rj8.2@149.365,96.266
  Top Layer w1.5: -5v+.1@43.942,154.559 43.942,151.13 44.262,150.81 ; 44.353,150.901 44.262,150.81 ; 46.228,58.293 43.688,58.293 41.148,58.293 38.608,58.293 36.027,58.293 35.316,57.582 35.31,57.582 34.239,56.511 34.239,52.768 32.703,51.232 27.803,51.232 26.924,52.111 26.746,59.909 26.746,79.791 26.924,79.969 26.924,90.755 26.056,91.623 26.056,100.655 27.94,102.539 27.94,114.102 25.93,116.112 25.93,141.373 25.932,141.375 25.932,144.364 26.959,145.391 29.948,145.391 33.989,149.432 42.883,149.432 44.262,150.81
  Bottom Layer w1: v2(76.713,137.038) 80.908,137.038 81.04,136.906 v2(83.543,136.906)
"Net12v mosfet 1_1": "12v mosfet 1.1" "12v mosfet 1.2" "12v mosfet 1.5" "12v mosfet 1.6" "12v mosfet 1.7" "ESC pwr in1.1" "ESC pwr in2.1" "ESC pwr in3.1" | length 58
  Top Layer w0.5: 132.804,151.909 132.804,152.559 133.439,152.559 133.739,152.259 133.739,152.194 133.77,152.163 134.628,152.163 134.819,151.972 135.393,152.547 135.393,152.851 v2(135.479,152.938) ; 133.739,152.559 134.674,152.559
  Top Layer w4: 116.459,125.357 117.395,125.357 120.713,128.675 120.713,132.199 117.395,135.517 ; 116.459,135.517 117.395,135.517 ; 116.459,145.677 117.285,144.851 118.221,144.851 120.713,142.359 120.713,138.835 117.395,135.517
  Bottom Layer w3: 116.459,145.677 132.088,145.677 134.168,147.757 134.168,149.378 135.479,150.689 v2(135.479,152.938)
"Net12v mosfet 1_4": "12v mosfet 1.4" "12v mosfet 1.8" -12v+.1@86.233,154.686 | length 64.6
  Top Layer w0.5: 133.739,151.134 134.133,151.134 134.247,151.02 134.755,151.02 134.834,151.099 134.953,151.218 135.009,151.218
  Top Layer w1: v2(131.265,151.077) 131.338,151.077 132.086,150.33 133.82,150.33 134.239,150.749
  Bottom Layer w3: -12v+.1@86.106,154.559 86.106,154.355 97.093,143.368 107.661,143.368 v2(110.465,140.564) 113.205,143.304 113.205,149.905 114.962,151.662 130.681,151.662 v2(131.265,151.077)
"Net12v mosfet 2_1": "12v mosfet 2.1" "12v mosfet 2.2" "12v mosfet 2.5" "12v mosfet 2.6" "12v mosfet 2.7" "ESC pwr in4.1" "ESC pwr in5.1" "ESC pwr in6.1" | length 78.3
  Top Layer w0.5: 115.987,154.343 115.616,154.714 116.694,154.714 117.083,154.325 117.859,154.325 v2(118.007,154.178)
  Top Layer w1: 113.746,154.714 113.792,154.668 113.792,154.389 113.746,154.343 114.675,154.343 114.681,154.349 114.681,154.424 114.731,154.474 115.376,154.474 115.616,154.714
  Top Layer w4: 116.459,115.189 117.387,115.189 120.794,118.596 120.794,122.74 124.967,126.913 124.967,133.984 127.889,136.906 137.922,136.906 ; v2(118.007,154.178) 124.079,154.178 131.191,147.066 137.922,147.066
  Bottom Layer w4: 137.922,136.906 141.076,140.06 141.076,143.292 140.518,143.85 140.518,144.47 137.922,147.066
"Net12v mosfet 2_4": "12v mosfet 2.4" "12v mosfet 2.8" -12v+.1@96.393,154.686 | length 21.8
  Top Layer w0.5: v2(110.871,152.527) 113.962,152.527 114.465,153.03 114.465,153.078 114.601,153.214 ; 114.681,153.289 114.731,153.339 115.541,153.339 115.616,153.414
  Bottom Layer w3: -12v+.1@96.393,154.686 100.203,150.876 109.22,150.876 v2(110.871,152.527)
"Net12v mosfet 3_1": "12v mosfet 3.1" "12v mosfet 3.2" "12v mosfet 3.5" "12v mosfet 3.6" "12v mosfet 3.7" "ESC pwr in7.1" "ESC pwr in8.1" | length 287
  Top Layer w0.5: 139.077,151.751 139.727,151.751 140.012,152.036 140.268,151.78 141.371,151.78 141.513,151.638 142.24,151.638 142.777,151.101 143.539,151.101 v2(143.637,151.003) ; 139.077,152.401 140.947,152.401
  Top Layer w1.5: v1(71.755,60.96) v1@76.454,60.96 ; v1(76.454,60.864) v1(78.776,60.864) 78.807,60.833 v7(82.054,60.833) ; v1(90.606,60.61) v1(92.837,60.61) ; v1@92.837,60.579 v1@95.25,60.579 ; v1(95.25,60.61) 97.631,60.61 v1(97.718,60.523) ; v1@97.663,60.61 98.401,61.348 98.401,66.309 99.755,67.663 102.969,67.663 108.178,72.872 108.354,72.872 110.971,75.489 110.971,76.626 112.044,77.699 113.005,77.699 121.331,86.025 146.799,86.025 152.817,92.044 152.817,100.643 149.576,103.884 139.401,103.884 136.16,107.125 ; v1@98.401,60.61 100.519,60.61 101.358,59.771 104.215,59.771 105.404,60.96 v1(108.585,60.96) ; v1@108.585,60.864 v1(110.998,60.864) v1(113.411,60.864) v1(115.824,60.864) 117.858,62.898 123.989,62.898 v1@126.269,65.178 ; v1(126.269,65.659) v1@126.269,65.178 ; v1(126.269,68.072) v1(126.269,70.485) ; v1@126.365,68.072 126.365,65.659 126.365,65.274 v1@126.269,65.178 ; v1@126.365,70.485 v1(126.365,72.898) ; v1(131.953,60.864) v1(134.366,60.864) 141.919,60.864 142.523,61.468 v1(145.669,61.468) ; v1@131.953,60.96 129.54,60.96 v1(127.127,60.96) 126.269,61.818 v1@126.269,65.178 ; v1@145.669,61.372 v1(148.082,61.372) v1(150.495,61.372) v1(152.908,61.372) 154.463,62.927 v1(154.463,67.183) v1(154.463,69.596) v1(154.463,72.009) v1@154.463,74.326
  Top Layer w4: 137.922,116.459 136.986,116.459 133.668,113.141 133.668,109.617 136.16,107.125 140.62,107.125 146.43,112.935 146.43,119.983 139.667,126.746 137.922,126.746
  Bottom Layer w1.5: v7(82.054,60.833) 83.058,60.833 83.185,60.706 90.51,60.706 v1(90.606,60.61)
  Bottom Layer w3: 137.922,126.746 144.272,133.096 144.272,137.947 144.83,138.505 144.83,144.847 144.272,145.405 144.272,150.368 v2(143.637,151.003)
  other v1: 74.041,60.864 129.54,60.864 154.559,74.422
"Net12v mosfet 3_4": "12v mosfet 3.4" "12v mosfet 3.8" "Fan header 1.2" "Fan header 2.2" "Pump header.2" -12v+.1@76.073,154.686 | length 289.9
  Top Layer w1: 60.96,27.813 61.023,27.877 61.023,40.703 61.087,40.767 61.087,44.25 v2@61.722,44.885 ; v2@61.973,51.232 61.973,54.084 62.261,54.372 v2@62.261,58.674 ; v2(62.23,58.674) v2@62.23,58.747 ; v2(67.056,67.287) 67.056,67.31 81.722,81.976 92.014,81.976 92.928,81.976 100.738,89.786 101.634,89.786 102.539,89.786 103.508,90.755 103.508,91.66 103.508,93.385 103.508,101.349 107.188,105.029 107.188,121.17 106.943,121.415 106.943,129.266 106.822,129.388 v2(106.822,131.902) ; v2(140.716,154.305) 140.643,154.305 139.753,153.415 138.175,153.415 136.669,151.909 136.669,151.081 137.578,150.172 139.604,150.172 140.089,150.657 141.018,150.657 141.062,150.701
  Bottom Layer w1: v2(61.722,44.958) 61.722,50.981 61.976,51.235 v2(61.976,51.308) ; v2(62.23,58.674) 62.23,62.484 67.033,67.287 v2(67.056,67.287)
  Bottom Layer w3: -12v+.1@76.073,154.686 77.429,153.33 77.429,152.414 93.983,135.86 102.863,135.86 v2(106.822,131.902) ; v2@107.175,131.94 113.805,125.311 113.805,109.01 115.36,107.455 137.751,107.455 147.526,117.23 147.526,136.599 148.084,137.157 148.084,146.195 147.526,146.753 147.526,151.716 144.556,154.686 141.097,154.686 v2(140.716,154.305)
Net12vin1_2: "ESC pwr in1.2" "ESC pwr in2.2" "ESC pwr in3.2" -12v+.2@81.153,154.686 | length 67.3
  Top Layer w4: 115.46,130.5 112.205,133.755 112.205,135.911 v2(111.929,136.186) 111.929,137.003 115.523,140.597 116.459,140.597 ; 116.459,120.277 115.523,120.277 112.205,123.595 112.205,127.119 115.523,130.437 116.459,130.437
  Bottom Layer w4: -12v+.2@81.183,154.432 81.183,153.969 95.538,139.614 104.418,139.614 107.846,136.186 v2(111.929,136.186)
Net12vin2_2: "ESC pwr in4.2" "ESC pwr in5.2" "ESC pwr in6.2" -12v+.2@91.313,154.686 | length 102
  Top Layer w3: v2(109.088,147.122) 109.535,146.675 112.148,146.675 114.904,149.431 116.411,149.431 116.412,149.432 119.634,149.432 120.233,148.833
  Top Layer w4: 116.459,110.109 117.285,110.935 119.149,110.935 126.445,118.231 126.445,122.375 129.221,125.151 129.221,125.157 135.89,131.826 137.922,131.826 138.748,132.652 139.684,132.652 142.176,135.144 142.176,138.668 138.858,141.986 137.922,141.986 127.102,141.986 120.244,148.844 120.233,148.833
  Bottom Layer w4: -12v+.2@91.313,154.686 91.313,154.457 98.648,147.122 v2(109.088,147.122)
"NetArdu headers 1_1": "Arduino headers.1"@32.131,55.88 "Mosfet rj6.1.2" | length 102.8
  Top Layer w0.254: 32.131,55.88 33.108,56.857 33.108,57.039 35.886,59.817 64.048,59.817 64.909,58.956 64.909,54.486 65.151,54.244 65.151,49.774 65.327,49.598 65.327,47.439 66.935,45.831 66.935,45.721 67.183,45.473 v4(67.183,45.339)
  Bottom Layer w0.254: v4(67.183,45.339) 70.231,42.291 111.379,42.291 v3(116.967,47.879)
"NetArdu headers 1_2": "Arduino headers.2"@29.591,55.88 "Mosfet rj6.3.2" | length 130.4
  Top Layer w0.254: 29.591,55.88 28.53,57.847 cw(c29.591,58.42) 28.409,58.179 27.912,60.617 cw(c29.591,60.96) 27.877,60.96 27.877,78.74 cw(c29.591,78.74) 28.007,79.394 28.934,81.639 29.083,81.788 32.766,81.788 40.894,73.66 40.894,67.84 41.043,67.691 64.008,67.691 64.135,67.564 64.262,67.564 65.342,67.564 66.739,66.167 69.763,66.167 70.271,66.675 73.406,66.675 74.422,65.659 81.098,65.659 82.368,64.389 v2(83.693,64.389) ; v5(107.315,51.054) 110.719,51.054 111.821,49.952 111.821,48.617 111.752,48.549 111.752,48.075
  Bottom Layer w0.254: v2(83.693,64.389) 93.07,64.389 95.979,61.48 97.115,61.48 97.738,62.103 98.401,62.103 105.791,54.713 105.791,51.816 106.434,51.173 107.196,51.173 v5(107.315,51.054)
"NetArdu headers 1_3": "Arduino headers.3"@32.131,58.42 "Mosfet rj6.2.2" | length 114.3
  Top Layer w0.254: 32.131,58.42 33.771,58.42 36.311,60.96 63.623,60.96 65.417,59.166 65.417,54.697 65.665,54.449 65.665,49.979 65.835,49.809 65.835,47.65 66.568,46.917 67.085,46.917 v4(67.18,46.822) ; v3(107.188,43.053) 106.362,42.227 106.362,37.83 106.79,37.402 112.971,37.402 113.922,38.354 113.922,39.505 114.874,40.456 114.874,47.006 114.293,47.587 114.293,48.028
  Bottom Layer w0.254: v4(67.18,46.822) 71.203,42.799 106.43,42.799 106.637,43.006 107.141,43.006 v3(107.188,43.053) v3@107.255,43.053
"NetArdu headers 1_4": "Arduino headers.4"@29.591,58.42 "Mosfet rj6.4.2" | length 128.4
  Top Layer w0.254: 29.591,58.42 28.53,60.387 cw(c29.591,60.96) 28.385,60.96 28.385,78.74 cw(c29.591,78.74) 28.74,79.594 29.091,79.946 32.631,79.946 39.878,72.699 39.878,67.31 40.64,66.548 65.64,66.548 66.529,65.659 69.973,65.659 70.481,66.167 73.196,66.167 74.212,65.151 80.887,65.151 83.705,62.333 83.705,62.274 84.003,61.976 84.062,61.976 84.213,61.825 84.213,57.317 88.085,53.444 88.085,48.287 v2(87.894,48.096) ; v5(106.704,49.344) 107.327,49.967 107.473,49.967 107.792,50.286 108.948,50.286 109.281,49.952 109.281,48.617 109.212,48.549 109.212,48.075
  Bottom Layer w0.254: v2(87.894,48.096) 88.053,47.936 90.206,47.936 90.514,47.628 98.428,47.628 99.822,49.022 106.182,49.022 106.504,49.344 v5(106.704,49.344)
"NetArdu headers 1_5": "Arduino headers.5"@32.131,60.96 rj8.3 | length 137.7
  Bottom Layer w1: 32.131,60.96 39.847,68.676 84.933,68.676 85.107,68.85 109.645,68.85 112.894,65.601 116.047,65.601 116.899,66.453 116.899,67.657 116.8,67.757 116.8,68.893 116.899,68.993 116.899,70.197 116.886,70.21 116.886,71.467 116.899,71.48 116.899,72.737 ; 116.898,72.738 116.898,73.402 129.504,86.007 138.695,86.007 145.814,93.126 145.814,93.14 146.399,93.726 rj8.3@149.365,93.726
"NetArdu headers 1_6": "Arduino headers.6"@29.591,60.96 "Mosfet rj7.2.2"@135.374,48.04 | length 147.7
  Top Layer w0.254: 29.591,60.96 30.797,59.754 33.463,59.754 35.177,61.468 64.262,61.468 65.925,59.805 65.925,55.28 66.173,55.032 66.173,50.507 66.343,50.337 66.343,48.345 66.802,47.886 v4(66.802,47.752) ; v3(106.68,43.815) 105.854,42.989 105.854,37.62 106.835,36.639 108.039,36.639 108.864,35.814 115.173,35.814 115.462,36.103 120.886,36.103 121.175,35.814 126.365,35.814 v2(126.492,35.941) ; 135.374,48.04 135.374,48.514 135.636,48.776 v3(135.636,50.423)
  Bottom Layer w0.254: v4(66.802,47.752) 66.897,47.657 67.414,47.657 67.936,47.135 67.936,46.96 71.507,43.389 106.214,43.389 106.64,43.815 v3(106.68,43.815) ; v2(126.492,35.941) 126.492,35.901 128.23,34.163 132.08,34.163 135.955,38.038 135.955,44.165 135.636,44.484 v3(135.636,50.423)
"NetArdu headers 1_7": "Arduino headers.7"@32.131,63.5 rj7.3 | length 125.9
  Bottom Layer w1: 32.131,63.5 34.728,66.097 35.495,66.097 39.328,69.93 77.4,69.93 77.574,70.104 106.299,70.104 111.402,75.207 111.402,77.112 112.014,77.724 113.919,77.724 123.456,87.261 134.949,87.261 140.814,93.126 140.814,93.14 141.399,93.726 rj7.3@144.365,93.726
"NetArdu headers 1_8": "Arduino headers.8"@29.591,63.5 "Mosfet rj7.2.2"@132.826,48.006 | length 144.6
  Top Layer w0.254: 29.591,63.5 30.861,62.23 64.218,62.23 66.433,60.015 66.433,55.49 66.681,55.242 66.681,50.717 66.851,50.547 66.851,49.128 67.152,48.827 v4(67.152,48.693) ; v3(106.047,44.448) 105.346,43.748 105.346,37.409 106.624,36.131 107.829,36.131 109.162,34.798 116.051,34.798 116.368,35.115 119.896,35.115 119.924,35.087 123.453,35.087 123.479,35.113 125.883,35.113 126.071,34.925 126.137,34.925 126.264,34.798 127.741,34.798 128.249,35.306 v2(128.524,35.306) ; v3(131.191,50.217) 132.562,50.217 132.895,49.883 132.895,48.549 132.826,48.48 132.826,48.006
  Bottom Layer w0.254: v4(67.152,48.693) 67.152,48.638 68.444,47.345 68.444,47.17 71.672,43.942 105.54,43.942 v3(106.047,44.448) ; v2(128.524,35.306) 128.591,35.373 129.988,35.373 132.207,37.592 132.207,39.619 131.191,40.635 v3(131.191,50.217)
"NetArdu headers 1_9": "Arduino headers.9"@32.131,66.04 rj6.3 | length 119.8
  Bottom Layer w1: 32.131,66.04 32.307,66.04 33.618,67.351 34.975,67.351 38.808,71.184 76.881,71.184 77.669,71.972 106.393,71.972 110.148,75.727 110.148,77.631 121.032,88.515 131.203,88.515 135.814,93.126 135.814,93.14 136.399,93.726 rj6.3@139.365,93.726
"NetArdu headers 1_10": "Arduino headers.10"@29.591,66.04 "Mosfet rj7.3.2" | length 142.8
  Top Layer w0.254: 29.591,66.04 30.797,64.834 32.503,64.834 34.036,63.301 34.036,63.014 34.312,62.738 64.429,62.738 66.941,60.226 66.941,55.701 67.189,55.453 67.189,50.928 67.359,50.757 67.359,50.2 67.512,50.047 67.512,49.686 v4(67.607,49.591) ; v3(105.918,45.212) 104.838,44.132 104.838,37.199 106.414,35.623 107.619,35.623 109.079,34.163 116.134,34.163 116.578,34.607 119.686,34.607 119.714,34.579 123.663,34.579 123.689,34.605 125.673,34.605 125.861,34.417 125.927,34.417 126.181,34.163 130.026,34.163 130.175,34.312 130.175,35.56 128.924,36.811 128.924,37.022 129.857,37.955 129.857,39.179 130.175,39.497 130.175,39.873 130.875,40.573 130.875,46.992 130.302,47.565 130.302,48.006
  Bottom Layer w0.254: v4(67.607,49.591) 67.607,49.457 67.855,49.209 67.855,49.059 67.908,49.006 67.908,48.6 68.952,47.556 68.952,47.38 71.793,44.54 105.246,44.54 v3(105.918,45.212)
"NetArdu headers 1_11": "Arduino headers.11"@32.131,68.58 rj5.3 | length 113.8
  Bottom Layer w1: 32.131,68.58 32.156,68.605 34.456,68.605 38.289,72.438 76.361,72.438 78.799,74.876 107.524,74.876 108.894,76.246 108.894,78.151 120.513,89.769 127.457,89.769 130.814,93.126 130.814,93.14 131.399,93.726 rj5.3@134.365,93.726
"NetArdu headers 1_12": "Arduino headers.12"@29.591,68.58 "Mosfet rj7.4.2" | length 150.8
  Top Layer w0.254: 29.591,68.58 30.925,67.246 32.631,67.246 34.671,65.206 34.671,63.5 34.925,63.246 64.639,63.246 67.449,60.436 67.449,56.014 67.697,55.766 67.697,51.343 68.02,51.02 68.02,50.608 v4(68.115,50.513) ; v3(105.283,45.72) 104.33,44.767 104.33,36.989 106.204,35.115 107.408,35.115 108.868,33.655 116.345,33.655 116.789,34.099 119.475,34.099 119.503,34.071 123.874,34.071 123.9,34.097 125.462,34.097 125.65,33.909 125.716,33.909 126.351,33.274 v2@127.127,33.274 ; v2(124.919,37.119) 124.903,37.135 124.903,41.297 125.603,41.997 125.603,48.998 126.891,50.286 127.49,50.286 128.143,49.632 128.143,47.245 127.754,47.634 127.754,48.075
  Bottom Layer w0.254: v4(68.115,50.513) 68.21,50.418 68.21,50.053 68.363,49.9 68.363,49.269 68.416,49.217 68.416,48.81 69.46,47.766 69.46,47.591 72.003,45.048 104.611,45.048 v3(105.283,45.72) ; v2(124.919,37.119) 124.919,35.609 v2(127.381,33.147)
"NetArdu headers 1_13": "Arduino headers.13"@32.131,71.12 "pwr only NO data.M1"@106.555,77.215 rj4.3 | length 107
  Bottom Layer w1: 32.131,71.12 35.197,71.12 37.769,73.692 75.842,73.692 78.604,76.454 102.688,76.454 103.655,77.421 107.012,77.421 107.079,77.488 107.079,78.109 119.993,91.023 126.662,91.023 rj4.3@129.365,93.726
"NetArdu headers 1_14": "Arduino headers.14"@29.591,71.12 "Mosfet rj8.3.2" | length 170.8
  Top Layer w0.254: 29.591,71.12 30.797,69.914 32.503,69.914 36.068,66.349 36.068,64.03 36.217,63.881 64.723,63.881 67.957,60.647 67.957,56.737 68.453,56.241 68.453,53.985 68.838,53.6 v4(68.838,51.21) ; v3(104.775,46.355) 103.822,45.402 103.822,36.778 105.993,34.607 107.198,34.607 108.647,33.158 108.647,32.439 110.919,30.167 118.417,30.167 118.914,30.664 123.207,30.664 123.706,30.165 131.398,30.165 132.573,31.34 132.573,31.691 133.965,33.084 134.316,33.084 138.571,37.338 v2(141.986,37.338) ; 148.836,48.04 148.836,48.514 148.905,48.583 148.905,50.099 v3(149.352,50.546)
  Bottom Layer w0.254: v4(68.838,51.21) 68.871,51.177 68.871,49.48 68.924,49.427 68.924,49.021 69.968,47.977 69.968,47.801 72.214,45.556 103.976,45.556 v3(104.775,46.355) ; v2(141.986,37.338) 147.079,37.4 ccw(c147.066,38.481) 147.984,37.91 148.646,38.978 cw(c149.606,38.481) 148.654,38.992 149.602,40.758 149.602,48.352 149.352,48.602 v3(149.352,50.546)